# EAGLE board ICS40300-Silicon-Mic_Rev-A.b#x (EAGLE 8.0.0)
REV: B
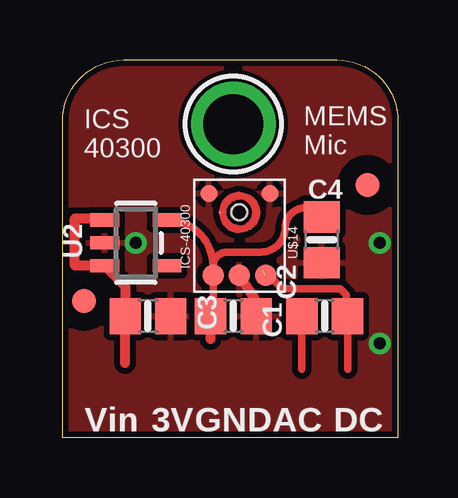
[diagram p0: board, top side]
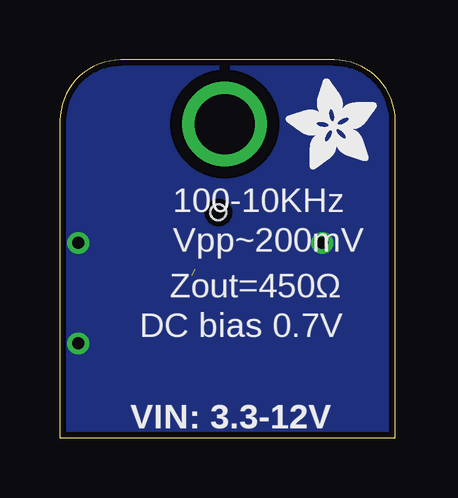
[diagram p1: board, bottom side, seen from below]

Size 13.97 x 15.75 mm. Coordinates in mm from the lower left corner, seen from the top.
Outline: 0,0 0,13.21 arc-90 2.54,15.75 11.43,15.75 arc-90 13.97,13.21 13.97,0 0,0
Copper layers (1*16): Top 0.035mm / dielectric 1.5mm / Bottom 0.035mm
Design rules "adafruit": minimum track width 8mil, minimum drill 15.5mil, track to track 8mil, track to pad 8mil, pad to pad 8mil, via to via 8mil, smd to smd 8mil, copper to edge 10mil, drill to drill 8mil, minimum pad ring 10mil, minimum via ring 8mil, stop-mask expansion 2mil, vias tented up to drill 20mil, thermal gap 10mil

## Footprints (pad centres in the part's own frame; a part is rotated, then mirrored left to right if it is on the bottom)
0805-NO = smd 1.3 x 1.5: 1 -0.95,0; 2 0.95,0
FIDUCIAL_1MM = smd 1 x 1: 1 0,0
SOT23-5 = smd 0.55 x 1.2: 1 -0.95,-1.3; 2 0,-1.3; 3 0.95,-1.3; 4 0.95,1.3; 5 -0.95,1.3
MOUNTINGHOLE_2.5_PLATED = drill 2.5 pad 3.2: P$1 0,0
ICS-40300 = smd 0.9 x 0.9: GND -2.62,0; OUT -2.62,-1.1; VDD -2.62,1.1 | smd 0.7 x 0.7: GND1 0.79,1.27; GND2 0.79,-1.27 | smd 0.1 x 0.1: GND3 0,0.82 | hole 0.65: 0,0

## Placement (x,y rotation side)
C1  10uF  [0805-NO]  10.92,5.08 0 top
C2  0.1uF  [0805-NO]  7.11,5.08 0 top
C3  10uF  [0805-NO]  3.56,5.08 0 top
C4  10uF  [0805-NO]  10.79,8.26 270 top
FID1  FIDUCIAL""  [FIDUCIAL_1MM]  0.89,5.71 0 top
FID2  FIDUCIAL""  [FIDUCIAL_1MM]  12.7,10.54 0 top
U2  MIC5225-3.3  [SOT23-5]  3.05,8.13 270 top
U$5  [ADAFRUIT_3.5MM]  0.76,11.18 90 bottom
U$12  MOUNTINGHOLE2.5  [MOUNTINGHOLE_2.5_PLATED]  7.11,13.08 0 top
U$14  ICS-40300  [ICS-40300]  7.37,9.4 90 top

## Library data of the parts
C1-C4 U2 U$5 = microbuilder
FID1 FID2 U$12 = microbuilder; BOM: EXCLUDE
U$14 = CMU-ArtFab

## Nets
GND: C2.2 C3.2 C4.2 U2.2 U$14.GND U$14.GND1 U$14.GND2 U$14.GND3
N$1: C1.2 U$14.OUT
N$2: C1.1
VDD: C2.1 C4.1 U2.5 U$14.VDD
VIN: C3.1 U2.1 U2.3

## Tracks (layer width: path | path; a pad name or v marks a point on that pad's centre or on a via)
GND  (via drill 0.5)
  Top 0.406: U$14.GND 8.13,5.59 C2.2
  other vias: 13.21,8.13 13.21,3.94 3.05,8.13
  pour Top (isolate 0.254): 0,0 0,15.88 13.97,15.88 13.97,0
  pour Bottom (isolate 0.254): 0,0.25 0,15.88 13.97,15.88 13.97,0
N$1  (1 unrouted)
  Top 0.305: 8.33,7.03 9.14,6.22 11.56,6.22 11.81,5.97 11.81,5.14 C1.2 11.87,2.86
N$2
  Top 0.305: C1.1 9.97,2.86
VDD
  Top 0.305: C2.1 arc90 6.27,5.18 U$14.VDD | U$14.VDD 6.27,7.16 arc90 U2.5 | U$14.VDD 6.27,7.16 arc-90 6.86,7.75 8.26,7.75 arc90 9.27,8.76 arc-148 C4.1
  Top 0.406: U2.5 4.39,9.08 | 6.16,4.13 C2.1 6.44,5.36
VIN
  Top 0.406: 2.61,3.11 C3.1 2.61,6.32 U2.3 0.51,7.18 0.51,9.14 1.75,9.14 U2.1

## Text on the board
tPlace: ICS / 40300 | MEMS / Mic | Vin | 3V | GND | AC | DC
bPlace: 100-10KHz | Vpp~200mV | Zout=450Ω | DC bias 0.7V | VIN: 3.3-12V